# EAGLE board frond.withname_manual_routing (EAGLE 7.2.0)
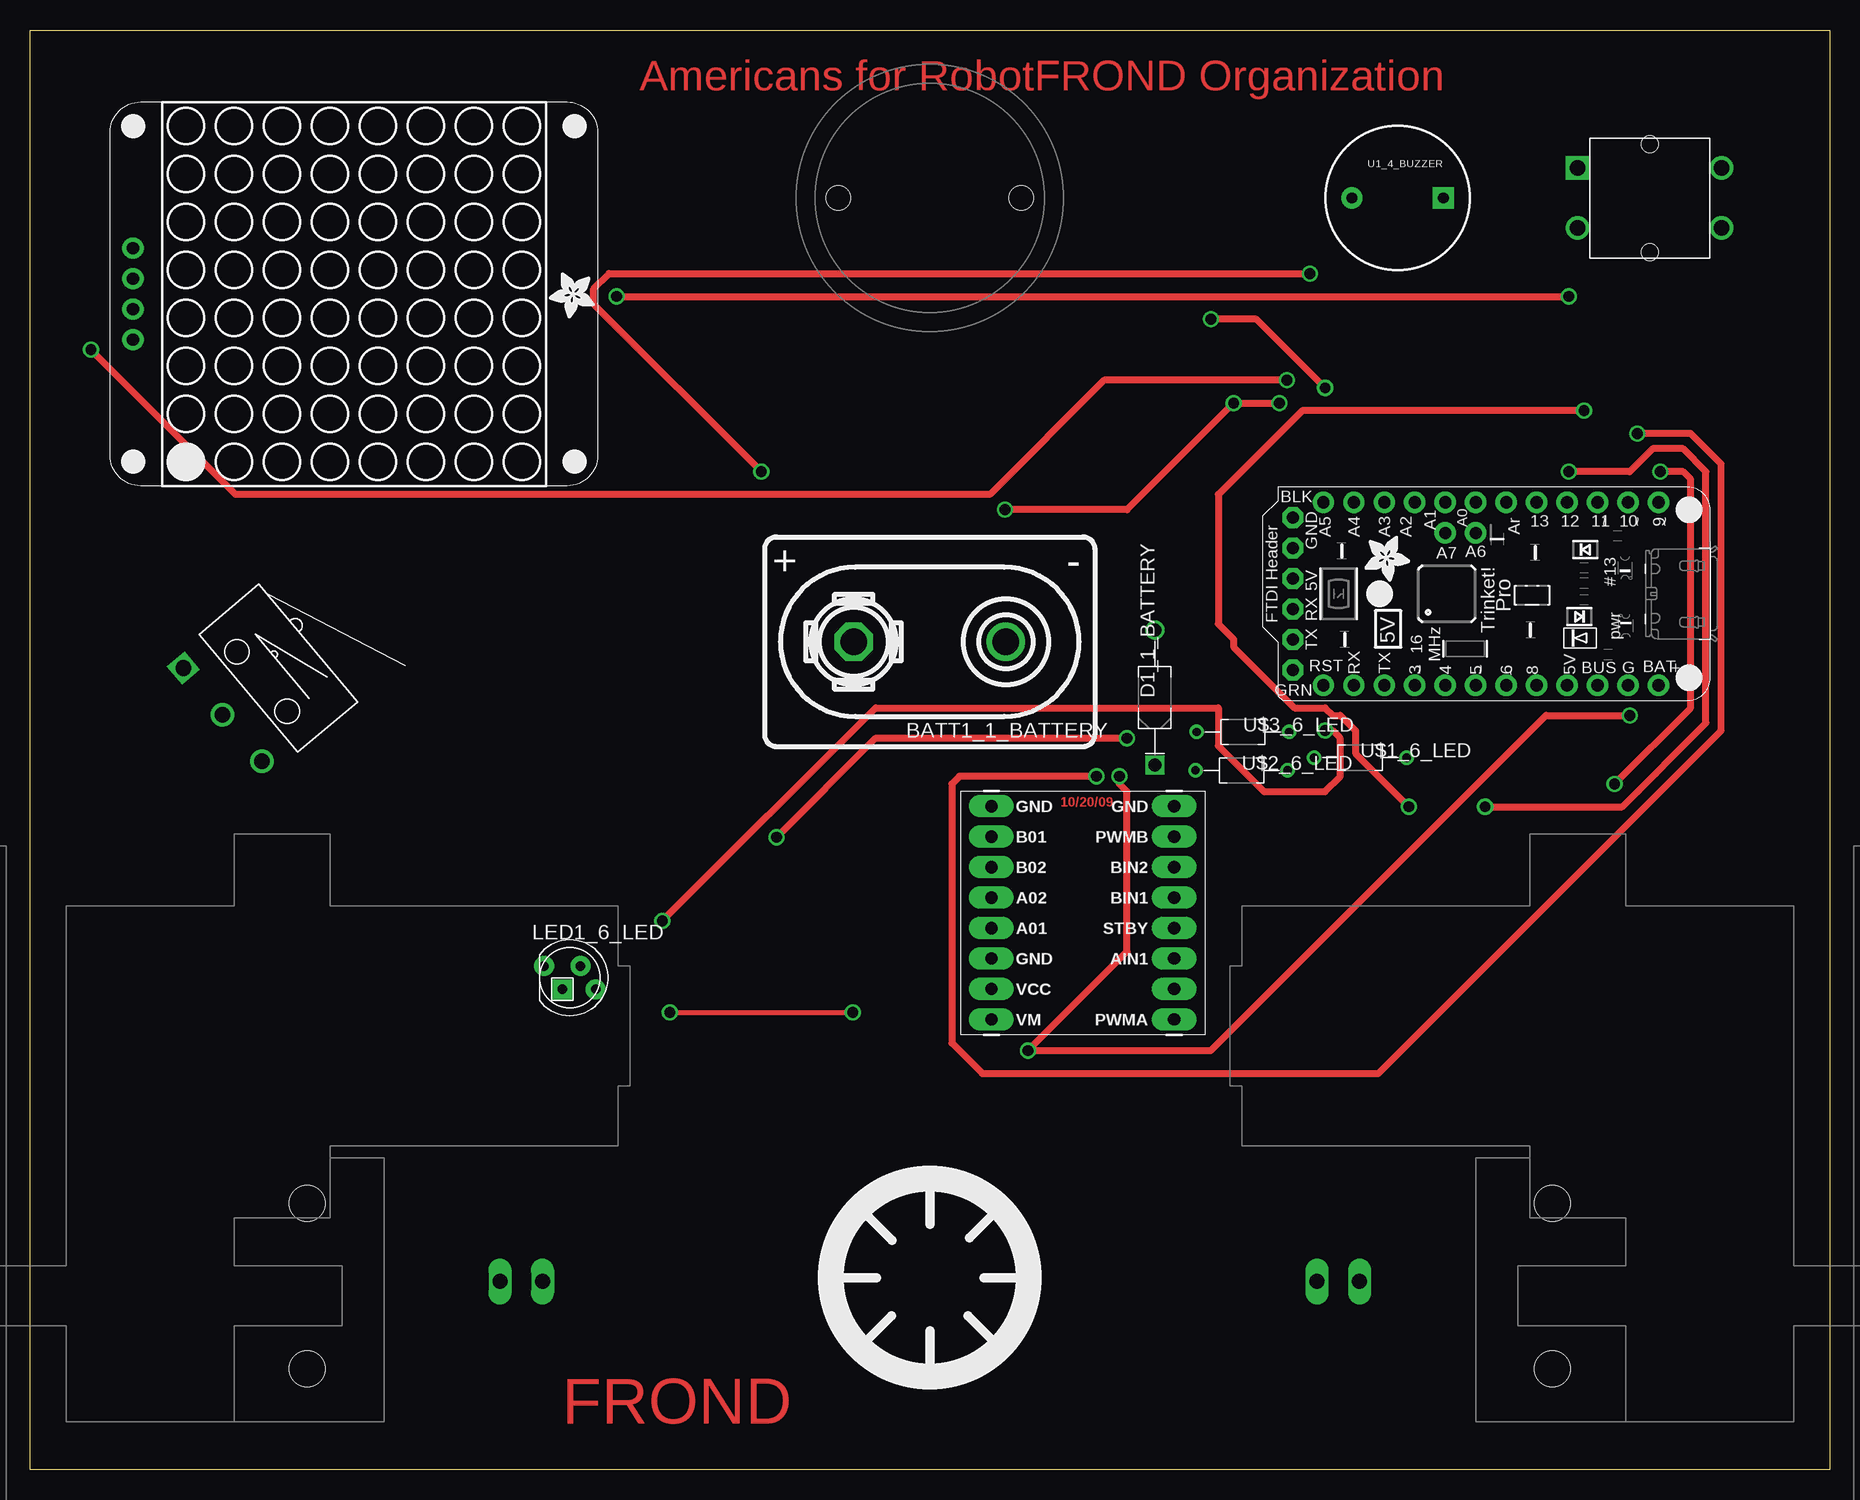
[diagram p0: board, top side]
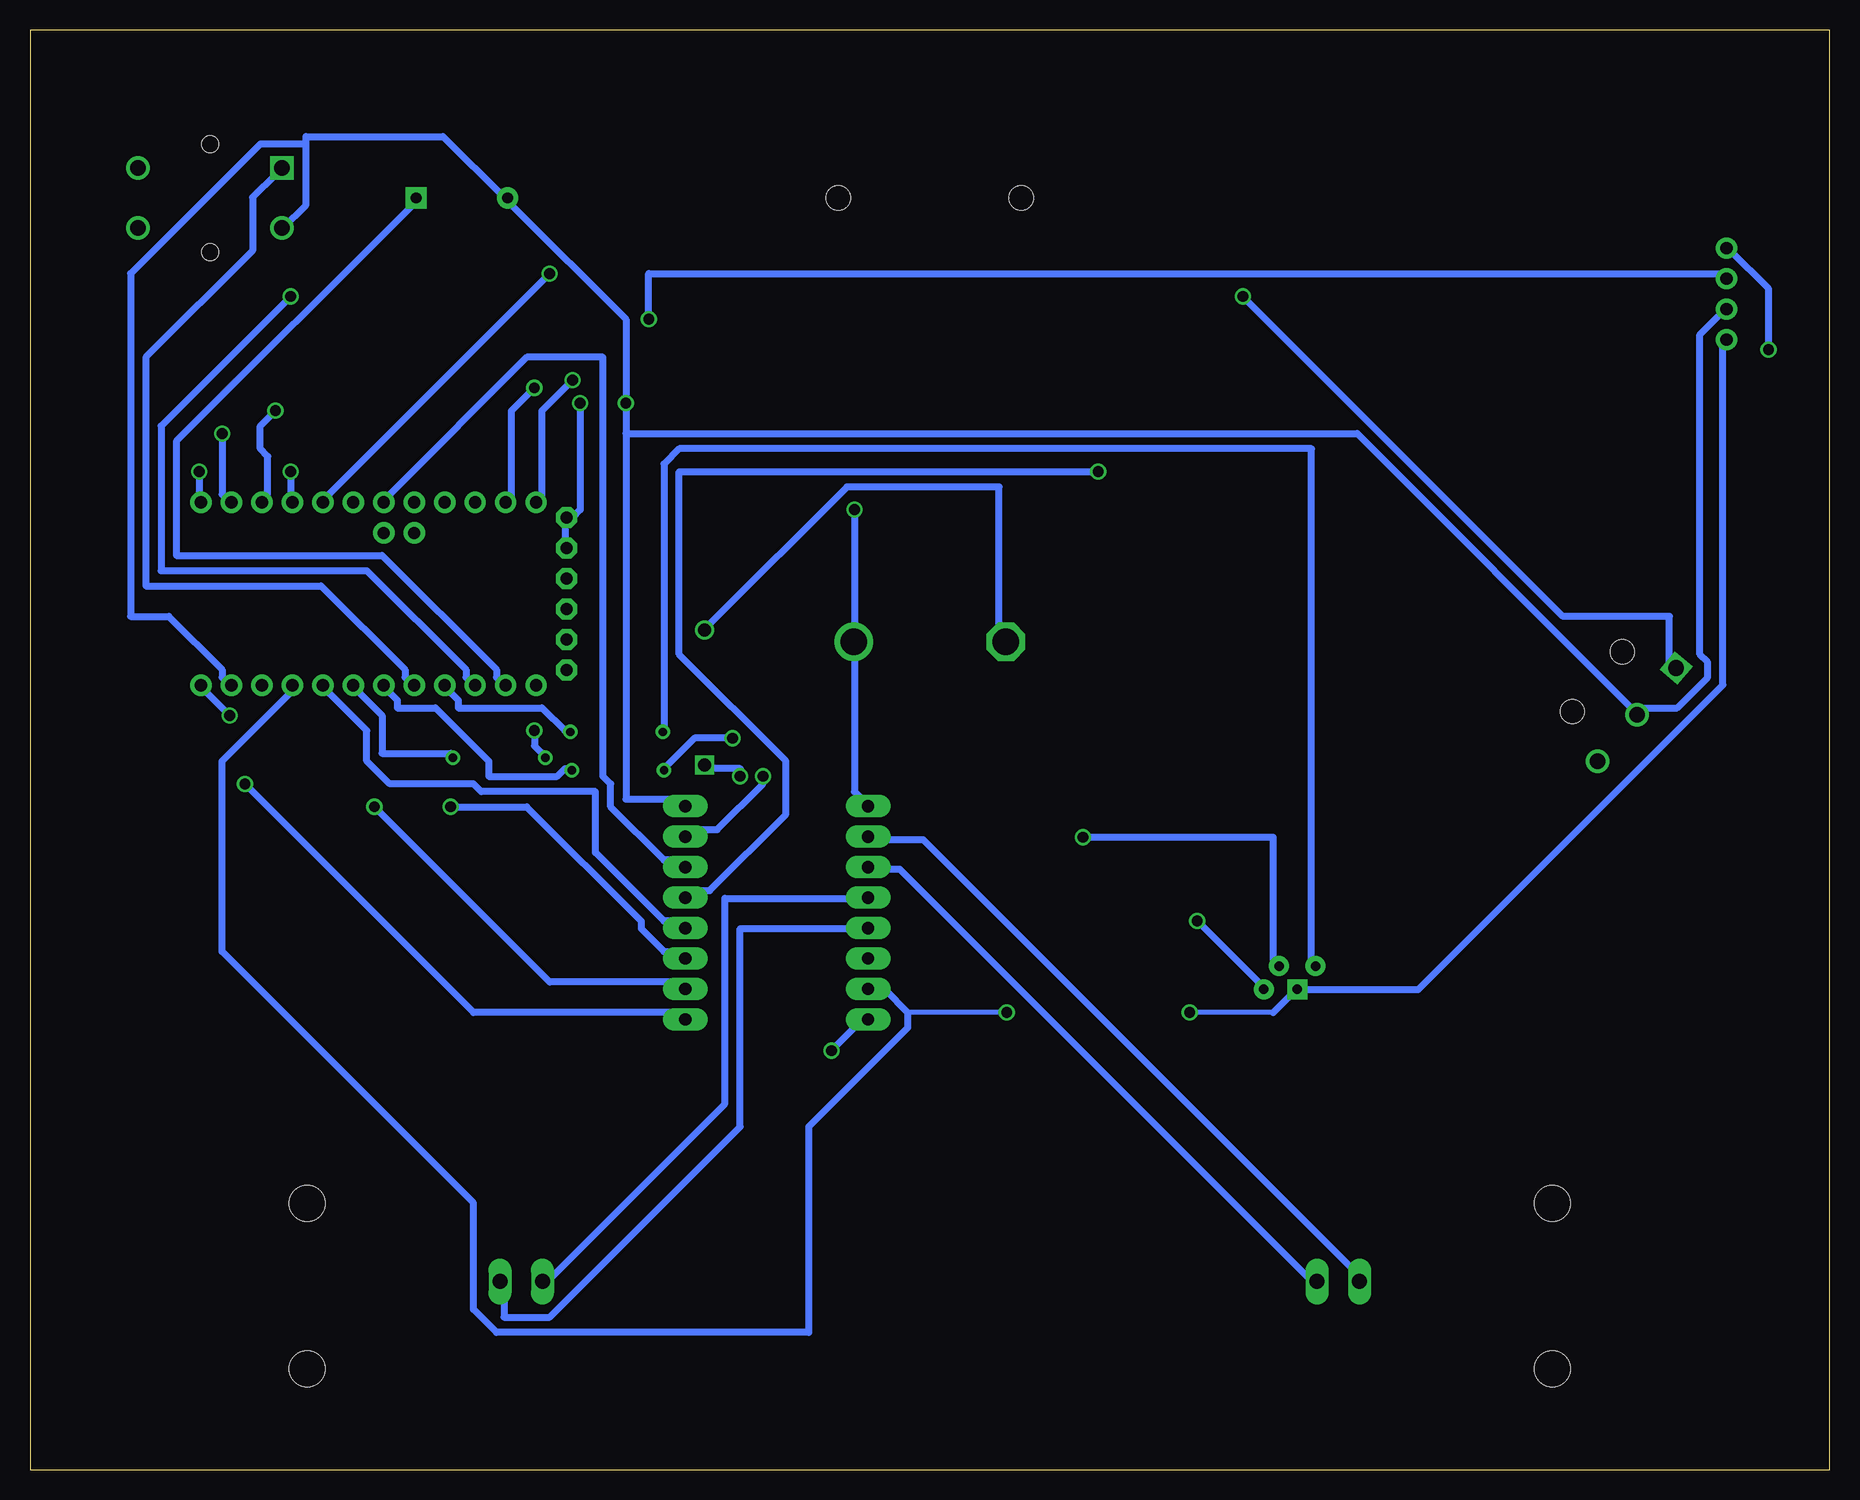
[diagram p1: board, bottom side, seen from below]

Size 150 x 120 mm. Coordinates in mm from the lower left corner, seen from the top.
Outline: 0,0 0,120 150,120 150,0 0,0
Copper layers (1*16): Top 0.035mm / dielectric 1.5mm / Bottom 0.035mm
Design rules "default": minimum track width 0.6mm, minimum drill 0.9mm, track to track 15mil, track to pad 0.6mm, pad to pad 0.5mm, via to via 0.38mm, smd to smd 8mil, copper to edge 40mil, drill to drill 8mil, minimum pad ring 10mil, minimum via ring 8mil, stop-mask expansion 4mil, vias tented up to drill 0mil, thermal gap 10mil
tRestrict: area 10.5,64.5 to 15.1,69.1; area 103.4,56.8 to 106.3,59.7; area 103.5,75 to 107.1,78.6; area 103.5,77.6 to 107.1,81.1; area 103.5,60 to 106.4,62.9; area 105.4,12.9 to 109.1,18.5; area 105.6,57.9 to 108.5,60.8; area 106,78.8 to 109.6,82.4; area 108.4,104.2 to 112,107.8; area 108.6,63.6 to 112.1,67.2; area 108.6,78.8 to 112.1,82.4; area 109,12.9 to 112.7,18.5; 51 more areas
vRestrict: area -10,-29 to 52,54.5; area 102.7,64.1 to 140.7,81.9; area 106.2,58 to 115.6,60.7; area 107.7,99.7 to 120.3,112.3; area 127.5,99 to 142.5,113; area 42,37.8 to 48.2,44.2; area 59.8,58.8 to 90.2,79.2; area 6,81.5 to 48,114.5; area 63.6,94.6 to 86.6,117.7; area 65.2,6.2 to 84.8,25.8; area 77.6,36.1 to 98,56.7; area 9.3,55.6 to 32.9,78.8; 4 more areas

## Footprints (pad centres in the part's own frame; a part is rotated, then mirrored left to right if it is on the bottom)
BUTTON-TACTILE-SQUARE-ADAFRUIT1010 = drill 1.3 square: P -6,2.5 | drill 1.3: P2 6,2.5; S -6,-2.5; S2 6,-2.5 | hole 1.4: 0,-4.5; 0,4.5
BATTERY_9V_KEYSTONE_968 = drill 2.2: N 6.35,0 | drill 2.2 octagon: P -6.35,0
DIOAD1125W78L520D270_HS = drill 1.06 pad 1.59: A 5.625,0 | drill 1.06 pad 1.59 square: C -5.625,0
SPARKFUN_DUAL_MOTOR_DRIVER = drill 1.016 pad 1.88 long: A01 7.62,1.27; A02 7.62,-1.27; AIN1 -7.62,3.81; AIN2 -7.62,6.35; B01 7.62,-6.35; B02 7.62,-3.81; BIN1 -7.62,-1.27; BIN2 -7.62,-3.81; GND -7.62,-8.89; GND1 7.62,3.81; GND2 7.62,-8.89; PWMA -7.62,8.89; PWMB -7.62,-6.35; STBY -7.62,1.27; VCC 7.62,6.35; VM 7.62,8.89
SOLARBOTICS_G2_LEFT = drill 1.27 long: + -41.18,-3.68; - -44.72,-3.68 | hole 3: -25.1,-10.2; -25.1,3.6
LED5MMRGB = drill 0.8 pad 1.676: 1 -2.159,0.968; 3 0.889,0.968; 4 2.159,-0.968 | drill 0.8 pad 1.676 square: 2 -0.635,-0.968
SOLARBOTICS_G2 = drill 1.27 long: + 41.18,-3.68; - 44.72,-3.68 | hole 3: 25.1,-10.2; 25.1,3.6
ADAFRUIT-PRO-TRINKET-5V = drill 1.016 pad 1.778: +5V 7.62,24.13; A0 -7.62,16.51; A1 -7.62,13.97; A2 -7.62,11.43; A3 -7.62,8.89; A4 -7.62,6.35; A5 -7.62,3.81; AREF -7.62,19.05; D3 7.62,11.43; D4 7.62,13.97; D5 7.62,16.51; D6 7.62,19.05; D8 7.62,21.59; D9 -7.62,31.75; D10 -7.62,29.21; D11 -7.62,26.67; D12 -7.62,24.13; D13 -7.62,21.59; GND2 7.62,29.21; RESET 7.62,3.81; RXD1 7.62,6.35; TXD1 7.62,8.89; VBAT 7.62,31.75; VBUS1 7.62,26.67 | drill 1 pad 1.778: A6 -5.08,16.51; A7 -5.08,13.97 | drill 1.016 pad 1.778 octagon: DTR/RTS 6.35,1.27; GND -6.35,1.27; GND1 -3.81,1.27; RXD 1.27,1.27; TXD 3.81,1.27; VBUS -1.27,1.27
ADAFRUIT-3/4IN-CASTER = hole 2: -7.62,0; 7.62,0
BUZZER-12MM = drill 0.9 pad 1.778 square: + 3.81,0 | drill 0.9 pad 1.778: - -3.81,0
ADAFRUIT-1.2IN-8X8-LED-BACKPACK = drill 1.016 pad 1.778: GND -18.415,-1.27; SCL -18.415,3.81; SDA -18.415,1.27; VDD -18.415,-3.81
RESAD770W45L370D210_HS = drill 0.7 pad 1.1: 1 -3.85,0; 2 3.85,0
BUMP_SWITCH_OMRON_D2FLA1 = drill 1.3 square: A -5.08,-2.8 | drill 1.3: B 0,-2.8; NC 5.08,-2.8 | hole 2: -3.25,1.5; 3.25,1.5

## Placement (x,y rotation side)
B1_7_BUTTON  BUTTON-TACTILE-SQUARE  [BUTTON-TACTILE-SQUARE-ADAFRUIT1010]  135,106 0 top
BATT1_1_BATTERY  BATTERY-9V-VERTICAL  [BATTERY_9V_KEYSTONE_968]  75,69 0 top
D1_1_BATTERY  [DIOAD1125W78L520D270_HS]  93.76,64.35 90 top
DRVR_9_DRIVE  SPARKFUN_DUAL_MOTOR_DRIVER-BOB  [SPARKFUN_DUAL_MOTOR_DRIVER]  87.76,46.4 180 top
L_9_DRIVE  SOLARBOTICS_GM2_LEFT  [SOLARBOTICS_G2_LEFT]  -2,12 180 top
LED1_6_LED  RGBLED_CA-5MM  [LED5MMRGB]  45,41 0 top
R_9_DRIVE  SOLARBOTICS_GM2  [SOLARBOTICS_G2]  152,12 180 top
U1_0_BRAIN  [ADAFRUIT-PRO-TRINKET-5V]  104,73 270 top
U1_2_CASTER  [ADAFRUIT-3/4IN-CASTER]  75,106 0 top
U1_3_PENHOLDER  [PENHOLDER]  75,16 0 top
U1_4_BUZZER  [BUZZER-12MM]  114,106 0 top
U1_8_DISPLAY_2  [ADAFRUIT-1.2IN-8X8-LED-BACKPACK]  27,98 0 top
U$1_6_LED  100  [RESAD770W45L370D210_HS]  110.89,59.34 0 top
U$2_5_BUMP  BUMP_SWITCH-MEDIUM-RIGHT  [BUMP_SWITCH_OMRON_D2FLA1]  18.2,64.72 310 top
U$2_6_LED  100  [RESAD770W45L370D210_HS]  101,58.28 0 top
U$3_6_LED  150  [RESAD770W45L370D210_HS]  101.11,61.48 0 top

## Library data of the parts
B1_7_BUTTON BATT1_1_BATTERY L_9_DRIVE R_9_DRIVE U1_2_CASTER U1_3_PENHOLDER U1_4_BUZZER U$2_5_BUMP = Components
D1_1_BATTERY = KoalaBuild; DATASHEET: http://www.st.com/web/en/resource/technical/document/datasheet/CD00001625.pdf; DB: /Users/sciencectn/Documents/nvsl/Gadgets/Tools/Koala/Koala/PartLibrary/Digikey/Schottky-Diodes-TH.csv; DEVICE: TH-DO-41-AND-DO-204AL; DIST: Digikey; DISTPN: 497-4547-1-ND; IMAGE: http://media.digikey.com/photos/STMicro%20Photos/1N5819.JPG; IRECT: 1A; MFR: STMicroelectronics; MIN_QTY: 1; MPN: 1N5817; PACKAGE: DIOAD1125W78L520D270_HS; PRICE: $0.57; SIZE: TH; STOCK: STOCK; VALUE: 450mV; VREV: 20V
DRVR_9_DRIVE U1_0_BRAIN U1_8_DISPLAY_2 = BOBs
LED1_6_LED = Components; CREATOR: Swanson
U$1_6_LED U$2_6_LED = KoalaBuild; CASE: TH; DATASHEET: http://www.yageo.com/NewPortal/yageodocoutput?fileName=/pdf/throughhole/Yageo_LR_CFR_2013.pdf; DB: /Users/sciencectn/Documents/nvsl/Gadgets/Tools/Koala/Koala/PartLibrary/Digikey/Resistors-TH.csv; DEVICE: TH-1/6W-CARBON; DIST: Digikey; DISTPN: 100EBK-ND; IMAGE: http://media.digikey.com/Renders/Yageo%20Renders/CFR-12JR-100R.jpg; MFR: Yageo; MIN_QTY: 1; MPN: CFR-12JB-52-100R; PACKAGE: RESAD770W45L370D210_HS; PRICE: $0.10; PWR: 167mW; SIZE: TH; STOCK: STOCK; TOL: 5%; VALUE_QUERY: 100
U$3_6_LED = KoalaBuild; CASE: TH; DATASHEET: http://www.yageo.com/NewPortal/yageodocoutput?fileName=/pdf/throughhole/Yageo_LR_CFR_2013.pdf; DB: /Users/sciencectn/Documents/nvsl/Gadgets/Tools/Koala/Koala/PartLibrary/Digikey/Resistors-TH.csv; DEVICE: TH-1/6W-CARBON; DIST: Digikey; DISTPN: 150EBK-ND; IMAGE: http://media.digikey.com/Renders/Yageo%20Renders/CFR-12JR-150R.jpg; MFR: Yageo; MIN_QTY: 1; MPN: CFR-12JB-52-150R; PACKAGE: RESAD770W45L370D210_HS; PRICE: $0.10; PWR: 167mW; SIZE: TH; STOCK: STOCK; TOL: 5%; VALUE_QUERY: 150

## Nets
+5V_0_BRAIN: DRVR_9_DRIVE.VCC LED1_6_LED.2 U1_0_BRAIN.+5V U1_8_DISPLAY_2.VDD
A0_0_BRAIN: DRVR_9_DRIVE.BIN2 U1_0_BRAIN.A0
A1_0_BRAIN: U1_0_BRAIN.A1
A01_9_DRIVE: DRVR_9_DRIVE.A01 R_9_DRIVE.+
A2_0_BRAIN: U1_0_BRAIN.A2
A02_9_DRIVE: DRVR_9_DRIVE.A02 R_9_DRIVE.-
A3_0_BRAIN: U1_0_BRAIN.A3
A4_0_BRAIN: U1_0_BRAIN.A4 U1_8_DISPLAY_2.SDA
A5_0_BRAIN: U1_0_BRAIN.A5 U1_8_DISPLAY_2.SCL
A6_0_BRAIN: U1_0_BRAIN.A6
A7_0_BRAIN: U1_0_BRAIN.A7
AREF_0_BRAIN: U1_0_BRAIN.AREF
B01_9_DRIVE: DRVR_9_DRIVE.B01 L_9_DRIVE.+
B02_9_DRIVE: DRVR_9_DRIVE.B02 L_9_DRIVE.-
D3_0_BRAIN: U1_0_BRAIN.D3 U$3_6_LED.2
D4_0_BRAIN: B1_7_BUTTON.P U1_0_BRAIN.D4
D5_0_BRAIN: U1_0_BRAIN.D5 U$2_6_LED.2
D6_0_BRAIN: U1_0_BRAIN.D6 U$1_6_LED.2
D8_0_BRAIN: DRVR_9_DRIVE.STBY U1_0_BRAIN.D8
D9_0_BRAIN: DRVR_9_DRIVE.PWMA U1_0_BRAIN.D9
D10_0_BRAIN: DRVR_9_DRIVE.PWMB U1_0_BRAIN.D10
D11_0_BRAIN: DRVR_9_DRIVE.AIN1 U1_0_BRAIN.D11
D12_0_BRAIN: DRVR_9_DRIVE.AIN2 U1_0_BRAIN.D12
D13_0_BRAIN: DRVR_9_DRIVE.BIN1 U1_0_BRAIN.D13
DTR/RTS_0_BRAIN: U1_0_BRAIN.DTR/RTS
GND1_9_DRIVE: DRVR_9_DRIVE.GND1
GND2_0_BRAIN: B1_7_BUTTON.S BATT1_1_BATTERY.N DRVR_9_DRIVE.GND DRVR_9_DRIVE.GND2 U1_0_BRAIN.GND U1_0_BRAIN.GND1 U1_0_BRAIN.GND2 U1_4_BUZZER.- U1_8_DISPLAY_2.GND U$2_5_BUMP.B
N$1_1_BATTERY: BATT1_1_BATTERY.P D1_1_BATTERY.A
N$1_6_LED: LED1_6_LED.4 U$1_6_LED.1
N$2_6_LED: LED1_6_LED.3 U$2_6_LED.1
N$3_6_LED: LED1_6_LED.1 U$3_6_LED.1
RESET_0_BRAIN: U1_0_BRAIN.RESET
RXD1_0_BRAIN: U1_0_BRAIN.RXD1 U1_4_BUZZER.+
RXD_0_BRAIN: U1_0_BRAIN.RXD
TXD1_0_BRAIN: U1_0_BRAIN.TXD1 U$2_5_BUMP.A
TXD_0_BRAIN: U1_0_BRAIN.TXD
VBUS1_0_BRAIN: U1_0_BRAIN.VBUS1
VBUS_0_BRAIN: U1_0_BRAIN.VBUS
VM_9_DRIVE: D1_1_BATTERY.C DRVR_9_DRIVE.VM U1_0_BRAIN.VBAT

## Tracks (layer width: path | path; a pad name or v marks a point on that pad's centre or on a via)
+5V_0_BRAIN  (via drill 0.9)
  Top 0.406: v53.34,38.1 v68.58,38.1
  Bottom 0.406: 46.35,38.1 v53.34,38.1 | v68.58,38.1 76.83,38.1
  Bottom 0.6: U1_0_BRAIN.+5V 128.27,64.77 133.99,59.05 133.99,43.18 113.03,22.23 113.03,13.34 111.12,11.43 85.09,11.43 85.09,28.57 76.83,36.83 76.83,38.1 78.74,40.01 80.01,40.01 DRVR_9_DRIVE.VCC | 46.35,38.1 44.45,40.01 LED1_6_LED.2 43.81,40.01 34.29,40.01 8.89,65.41 8.89,93.98 U1_8_DISPLAY_2.VDD
A0_0_BRAIN
  Bottom 0.6: U1_0_BRAIN.A0 120.02,80.64 120.02,81.28 108.58,92.71 102.23,92.71 102.23,57.78 101.6,57.15 101.6,55.24 97.16,50.8 95.89,50.8 DRVR_9_DRIVE.BIN2
A01_9_DRIVE
  Bottom 0.6: R_9_DRIVE.+ 110.49,15.24 110.49,12.7 106.68,12.7 90.81,28.57 90.81,45.09 80.64,45.09 DRVR_9_DRIVE.A01
A02_9_DRIVE
  Bottom 0.6: R_9_DRIVE.- 106.68,15.88 92.08,30.48 92.08,47.62 80.64,47.62 DRVR_9_DRIVE.A02
A4_0_BRAIN  (via drill 0.9)
  Top 0.6: v98.42,95.89 102.23,95.89 v107.95,90.17
  Bottom 0.6: U1_0_BRAIN.A4 109.86,80.64 109.86,88.27 v107.95,90.17 | U1_8_DISPLAY_2.SDA 8.89,99.69 98.42,99.69 v98.42,95.89
A5_0_BRAIN  (via drill 0.9)
  Top 0.6: v104.78,90.81 89.53,90.81 80.01,81.28 17.14,81.28 v5.08,93.34
  Bottom 0.6: U1_0_BRAIN.A5 107.31,80.64 107.31,88.27 v104.78,90.81 | v5.08,93.34 5.08,98.42 8.26,101.6 U1_8_DISPLAY_2.SCL
B01_9_DRIVE
  Bottom 0.6: DRVR_9_DRIVE.B01 79.95,52.48 75.54,52.48 38.75,15.7 L_9_DRIVE.+
B02_9_DRIVE
  Bottom 0.6: DRVR_9_DRIVE.B02 79.95,50.03 77.5,50.03 43.16,15.7 L_9_DRIVE.-
D3_0_BRAIN
  Bottom 0.6: U$3_6_LED.2 105.41,61.59 107.31,63.5 114.3,63.5 114.3,64.14 114.94,64.77 U1_0_BRAIN.D3
D4_0_BRAIN
  Bottom 0.6: U1_0_BRAIN.D4 118.11,65.41 118.75,66.04 118.75,66.67 125.73,73.66 140.34,73.66 140.34,92.71 131.44,101.6 131.44,106.05 129.54,107.95 B1_7_BUTTON.P
D5_0_BRAIN
  Bottom 0.6: U$2_6_LED.2 105.41,58.42 106.05,57.78 111.76,57.78 111.76,59.05 116.2,63.5 119.38,63.5 119.38,64.14 120.02,64.77 U1_0_BRAIN.D5
D6_0_BRAIN
  Bottom 0.6: U$1_6_LED.2 114.94,59.69 120.65,59.69 120.65,62.87 122.56,64.77 U1_0_BRAIN.D6
D8_0_BRAIN
  Bottom 0.6: U1_0_BRAIN.D8 125.09,64.77 121.92,61.59 121.92,59.05 120.02,57.15 113.03,57.15 112.39,56.52 102.87,56.52 102.87,51.44 97.16,45.72 95.89,45.72 DRVR_9_DRIVE.STBY
D9_0_BRAIN  (via drill 0.9)
  Top 0.6: v132.08,57.15 138.43,63.5 138.43,82.55 137.79,83.19 v135.89,83.19
  Bottom 0.6: v132.08,57.15 113.03,38.1 95.89,38.1 DRVR_9_DRIVE.PWMA | U1_0_BRAIN.D9 135.89,80.64 v135.89,83.19
D10_0_BRAIN  (via drill 0.9)
  Top 0.6: v133.99,86.36 138.43,86.36 140.97,83.82 140.97,61.59 112.39,33.02 79.38,33.02 76.83,35.56 76.83,57.15 77.47,57.78 v88.9,57.78
  Bottom 0.6: U1_0_BRAIN.D10 133.35,80.64 133.99,81.28 v133.99,86.36 | v88.9,57.78 88.9,57.15 92.71,53.34 95.25,53.34 DRVR_9_DRIVE.PWMB
D11_0_BRAIN  (via drill 0.9)
  Top 0.6: v114.94,55.24 110.49,59.69 110.49,61.59 109.22,62.87 108.58,62.87 107.95,63.5 105.41,63.5 100.33,68.58 100.33,69.22 99.06,70.48 99.06,81.28 106.05,88.27 v129.54,88.27
  Bottom 0.6: v114.94,55.24 108.58,55.24 99.06,45.72 99.06,45.09 97.16,43.18 95.89,43.18 DRVR_9_DRIVE.AIN1 | U1_0_BRAIN.D11 130.18,80.64 130.18,84.45 130.81,85.09 130.81,87 v129.54,88.27
D12_0_BRAIN  (via drill 0.9)
  Top 0.6: v121.28,55.24 132.72,55.24 139.7,62.23 139.7,83.19 137.79,85.09 135.25,85.09 133.35,83.19 v128.27,83.19
  Bottom 0.6: v121.28,55.24 106.68,40.64 95.89,40.64 DRVR_9_DRIVE.AIN2 | U1_0_BRAIN.D12 128.27,80.64 v128.27,83.19
D13_0_BRAIN  (via drill 0.9)
  Top 0.6: v106.68,99.69 48.26,99.69 46.99,98.42 46.99,97.16 v60.96,83.19
  Bottom 0.6: v106.68,99.69 125.09,81.28 125.09,80.64 U1_0_BRAIN.D13 | DRVR_9_DRIVE.BIN1 95.25,48.26 93.34,48.26 87,54.61 87,59.05 95.89,67.94 95.89,83.19 v60.96,83.19
GND2_0_BRAIN  (via drill 0.9)
  Top 0.6: v104.14,88.9 v100.33,88.9 91.44,80.01 v81.28,80.01
  Bottom 0.6: 100.33,86.36 100.33,55.88 95.89,55.88 DRVR_9_DRIVE.GND | 100.33,86.36 39.37,86.36 16.51,63.5 U$2_5_BUMP.B 15.88,63.5 12.7,63.5 10.16,66.04 10.16,67.31 10.79,67.94 10.79,94.61 8.89,96.52 U1_8_DISPLAY_2.GND | 100.33,86.36 v100.33,88.9 100.33,95.89 109.86,105.41 U1_4_BUZZER.- 110.49,106.05 115.57,111.12 127,111.12 127,110.49 | v104.14,88.9 104.14,80.01 104.78,79.38 U1_0_BRAIN.GND 105.41,78.74 105.41,76.83 U1_0_BRAIN.GND1 | 127,110.49 127,105.41 128.91,103.5 B1_7_BUTTON.S | 127,110.49 130.81,110.49 141.6,99.69 141.6,71.12 138.43,71.12 133.99,66.67 133.99,66.04 133.35,65.41 U1_0_BRAIN.GND2 | DRVR_9_DRIVE.GND2 80.64,55.88 81.28,56.52 81.28,68.58 BATT1_1_BATTERY.N 81.28,69.22 v81.28,80.01
N$1_1_BATTERY
  Bottom 0.6: BATT1_1_BATTERY.P 69.22,69.22 69.22,81.92 81.92,81.92 93.34,70.48 D1_1_BATTERY.A
N$1_6_LED  (via drill 0.9)
  Top 0.6: v107.95,61.59 108.58,61.59 109.22,60.96 109.22,57.78 107.95,56.52 102.87,56.52 99.06,60.33 99.06,63.5 70.48,63.5 v52.7,45.72
  Bottom 0.6: U$1_6_LED.1 107.31,59.69 107.95,60.33 v107.95,61.59 | LED1_6_LED.4 47.62,40.64 v52.7,45.72
N$2_6_LED  (via drill 0.9)
  Top 0.6: v62.23,52.7 70.48,60.96 v91.44,60.96
  Bottom 0.6: LED1_6_LED.3 46.35,42.55 46.35,52.7 v62.23,52.7 | v91.44,60.96 94.61,60.96 97.16,58.42 U$2_6_LED.1
N$3_6_LED
  Bottom 0.6: LED1_6_LED.1 43.18,42.55 43.18,85.09 95.89,85.09 97.16,83.82 97.16,61.59 U$3_6_LED.1
RXD1_0_BRAIN
  Bottom 0.6: U1_0_BRAIN.RXD1 110.49,65.41 111.12,66.04 111.12,66.67 120.65,76.2 137.79,76.2 137.79,85.72 118.11,105.41 U1_4_BUZZER.+
TXD1_0_BRAIN  (via drill 0.9)
  Top 0.6: v48.9,97.79 v128.27,97.79
  Bottom 0.6: U1_0_BRAIN.TXD1 113.03,65.41 113.67,66.04 113.67,66.67 121.92,74.93 139.06,74.93 139.06,87 v128.27,97.79 | U$2_5_BUMP.A 13.34,67.31 13.34,71.12 22.23,71.12 v48.9,97.79
VM_9_DRIVE  (via drill 0.9)
  Top 0.6: v133.35,62.87 126.36,62.87 98.42,34.92 v83.19,34.92 91.44,43.18 91.44,56.52 90.81,57.15 v90.81,57.78
  Bottom 0.6: v133.35,62.87 135.25,64.77 U1_0_BRAIN.VBAT | DRVR_9_DRIVE.VM 80.64,37.47 v83.19,34.92 | v90.81,57.78 90.81,58.42 93.34,58.42 D1_1_BATTERY.C

## Text on the board
Top: Americans for RobotFROND Organization | FROND